# EAGLE board XBee-Explorer-Dongle-GiantPanel-v21 (EAGLE 6.5.0), part 1 of 4
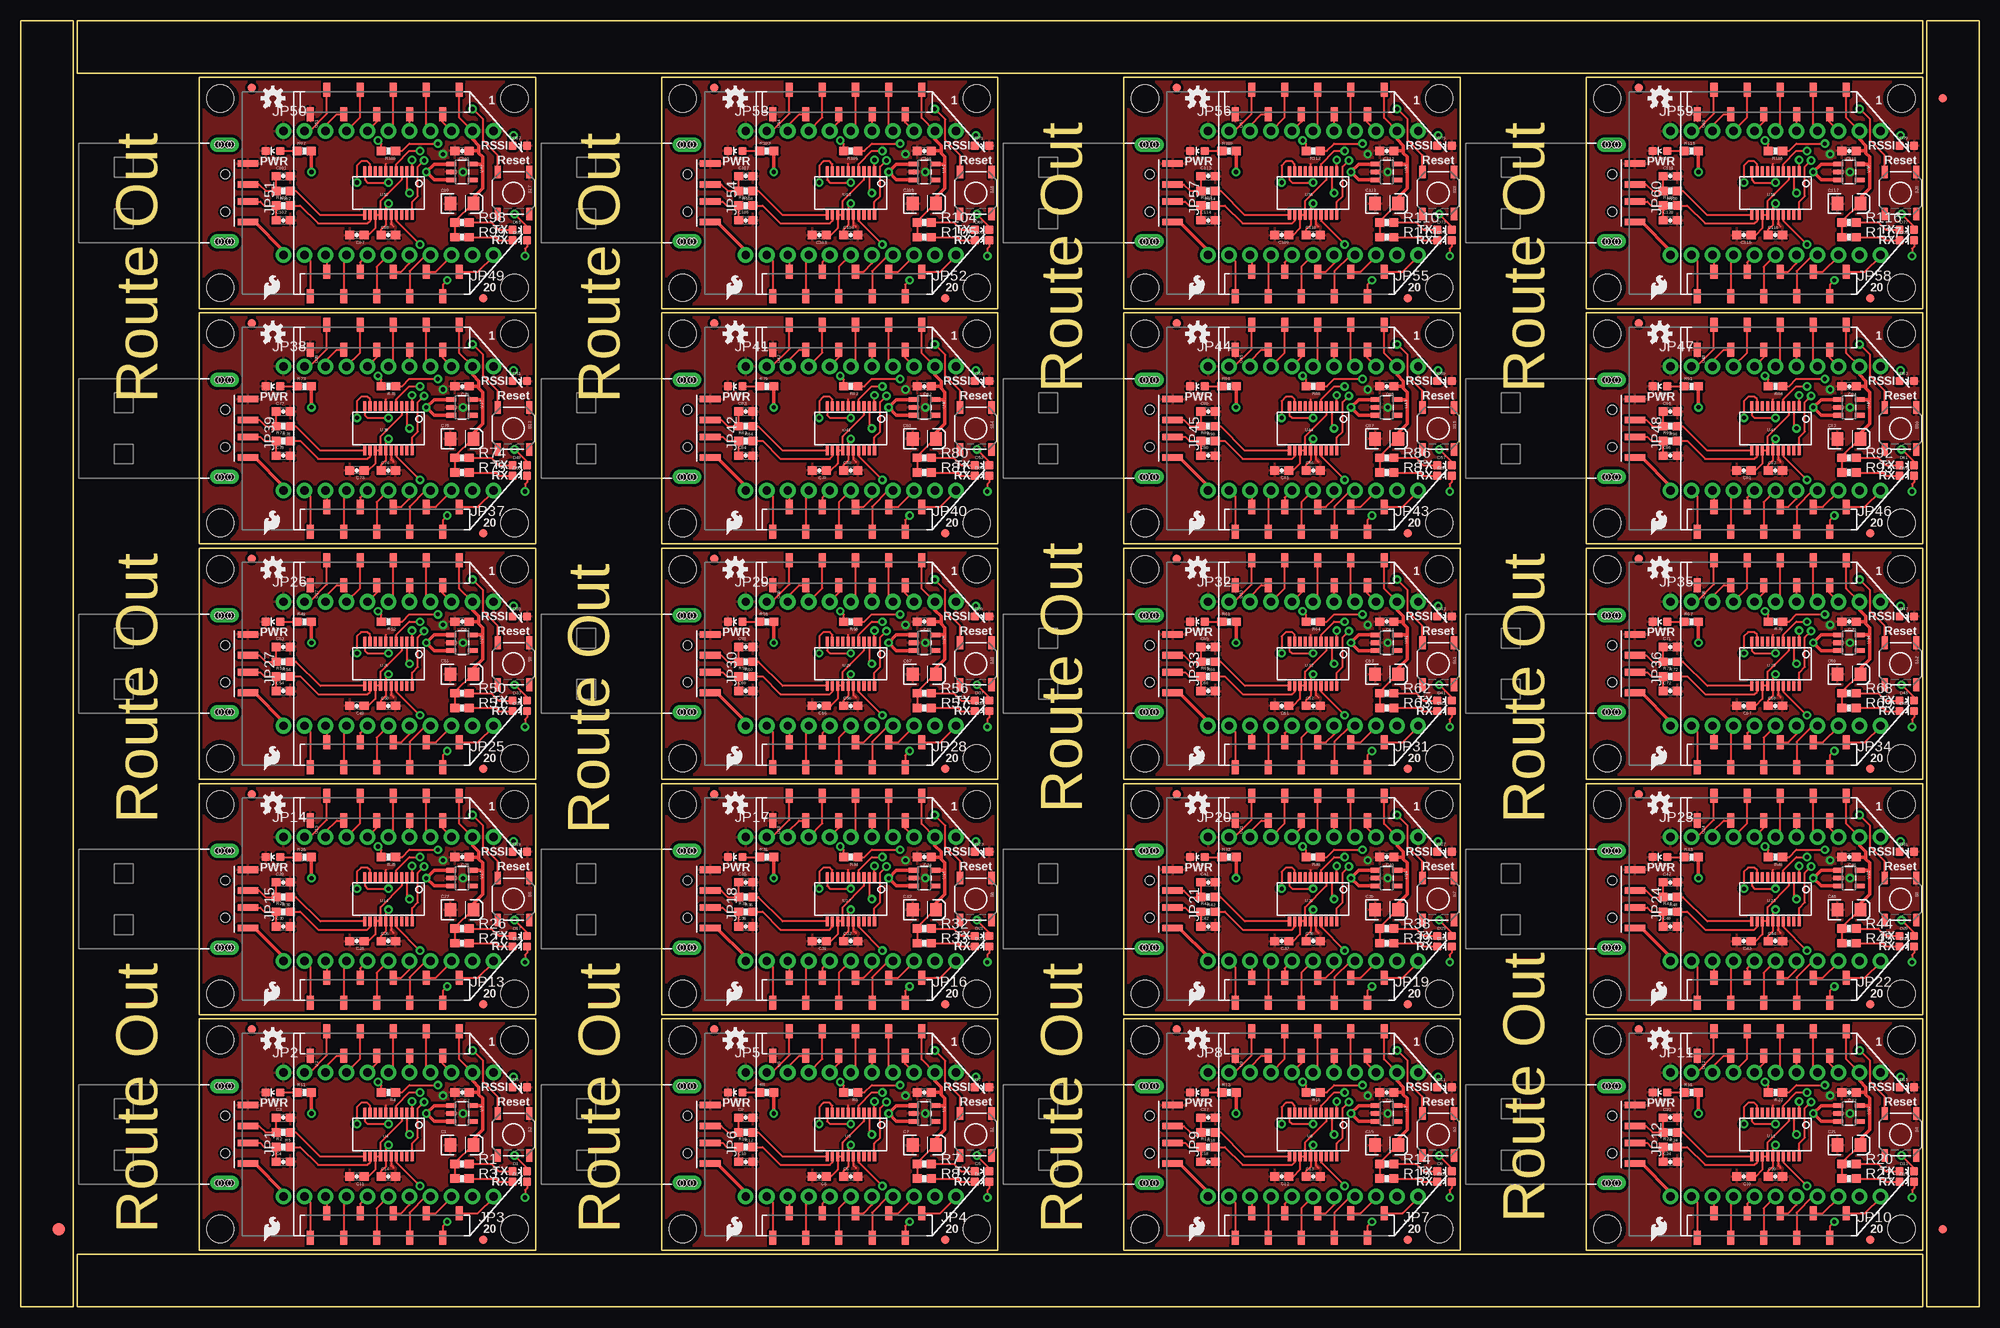
[diagram p0: board, top side]
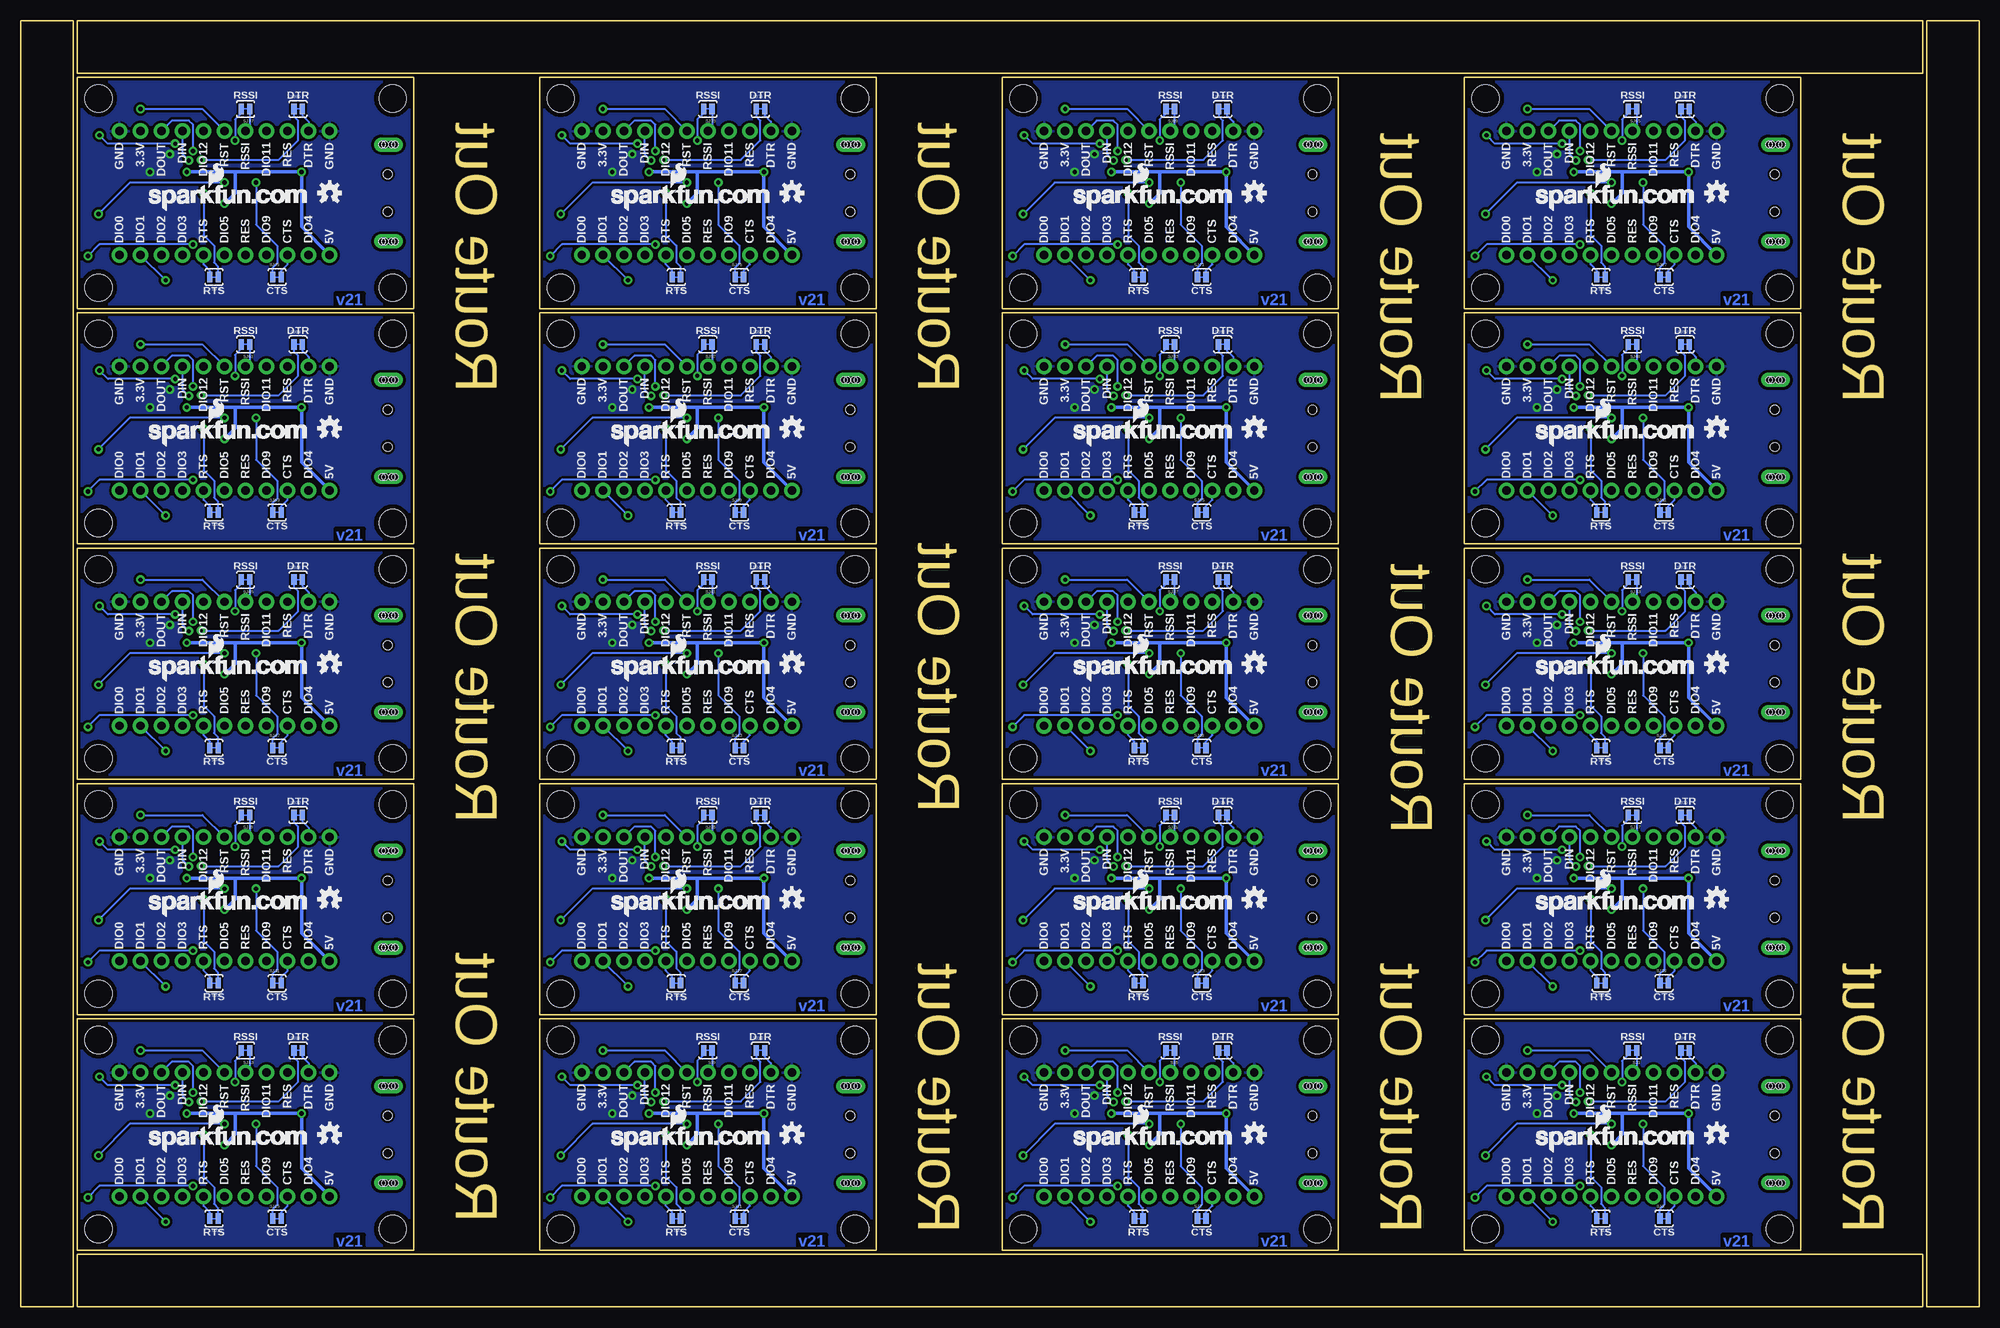
[diagram p1: board, bottom side, seen from below]

Size 236.73 x 155.45 mm. Coordinates in mm from the lower left corner, seen from the top.
Outline: 62.23,6.86 62.23,34.8 21.59,34.8 21.59,6.86 62.23,6.86
Outline: 118.11,6.86 118.11,34.8 77.47,34.8 77.47,6.86 118.11,6.86
Outline: 173.99,6.86 173.99,34.8 133.35,34.8 133.35,6.86 173.99,6.86
Outline: 229.87,6.86 229.87,34.8 189.23,34.8 189.23,6.86 229.87,6.86
Outline: 62.23,35.31 62.23,63.25 21.59,63.25 21.59,35.31 62.23,35.31
Outline: 118.11,35.31 118.11,63.25 77.47,63.25 77.47,35.31 118.11,35.31
Outline: 173.99,35.31 173.99,63.25 133.35,63.25 133.35,35.31 173.99,35.31
Outline: 229.87,35.31 229.87,63.25 189.23,63.25 189.23,35.31 229.87,35.31
Outline: 62.23,63.75 62.23,91.69 21.59,91.69 21.59,63.75 62.23,63.75
Outline: 118.11,63.75 118.11,91.69 77.47,91.69 77.47,63.75 118.11,63.75
Outline: 173.99,63.75 173.99,91.69 133.35,91.69 133.35,63.75 173.99,63.75
Outline: 229.87,63.75 229.87,91.69 189.23,91.69 189.23,63.75 229.87,63.75
Outline: 62.23,92.2 62.23,120.14 21.59,120.14 21.59,92.2 62.23,92.2
Outline: 118.11,92.2 118.11,120.14 77.47,120.14 77.47,92.2 118.11,92.2
Outline: 173.99,92.2 173.99,120.14 133.35,120.14 133.35,92.2 173.99,92.2
Outline: 229.87,92.2 229.87,120.14 189.23,120.14 189.23,92.2 229.87,92.2
Outline: 62.23,120.65 62.23,148.59 21.59,148.59 21.59,120.65 62.23,120.65
Outline: 118.11,120.65 118.11,148.59 77.47,148.59 77.47,120.65 118.11,120.65
Outline: 173.99,120.65 173.99,148.59 133.35,148.59 133.35,120.65 173.99,120.65
Outline: 229.87,120.65 229.87,148.59 189.23,148.59 189.23,120.65 229.87,120.65
Outline: 6.35,0 6.35,155.45 0,155.45 0,0 6.35,0
Outline: 6.86,6.35 6.86,0 229.87,0 229.87,6.35 6.86,6.35
Outline: 230.38,0 236.73,0 236.73,155.45 230.38,155.45 230.38,0
Outline: 229.87,149.1 229.87,155.45 6.86,155.45 6.86,149.1 229.87,149.1
Copper layers (1*16): Top 0.035mm / dielectric 1.5mm / Bottom 0.035mm
Design rules "SparkFun-2-layer": minimum track width 7mil, minimum drill 15mil, track to track 8mil, track to pad 8mil, pad to pad 8mil, via to via 8mil, smd to smd 8mil, copper to edge 8mil, drill to drill 8mil, minimum pad ring 12mil, minimum via ring 10mil, stop-mask expansion 4mil, vias tented up to drill 20mil, thermal gap 10mil
Net classes: 0 default: width 0.203 mm; 1 vcc: width 0.254 mm; 2 gnd: width 0.254 mm

## Footprints (pad centres in the part's own frame; a part is rotated, then mirrored left to right if it is on the bottom)
EIA3216 = smd 1.4 x 1.6: A 1.4,0; C -1.4,0
0603-CAP = smd 1.1 x 1: 1 -0.85,0; 2 0.85,0
LED-0603 = smd 1 x 1: A 0,-0.877; C 0,0.877
FIDUCIAL-1.5X3 = smd 1.5 x 1.5: 1 0,0
FIDUCIAL-1X2 = smd 1 x 1: 1 0,0
USB-A-SMT-MALE = smd 0.8 x 2.5: D+1 1.027,-5.87; D-1 -1.027,-5.87; GND1 3.551,-5.87; VBUS1 -3.5,-5.87 | drill 0.8 pad 1.778 long: P$1 5.85,-3.05; P$3 -5.85,-3.05 | hole 1.1: 2.25,-3.12; -2.25,-3.12 | hole 0.8: -5.85,-3.45; -5.85,-3.85; -5.85,-2.65; -5.85,-2.25; 5.85,-3.45; 5.85,-3.85; 5.85,-2.65; 5.85,-2.25
1X11_NO_SILK = drill 1.016 pad 1.88: 1 0,0; 2 2.54,0; 3 5.08,0; 4 7.62,0; 5 10.16,0; 6 12.7,0; 7 15.24,0; 8 17.78,0; 9 20.32,0; 10 22.86,0; 11 25.4,0
0603-RES = smd 1.1 x 1: 1 -0.85,0; 2 0.85,0
TACTILE_SWITCH_SMD = smd 1.524 x 0.762: 1 -2.54,1.905; 2 2.54,1.905; 3 -2.54,-1.905; 4 2.54,-1.905
SJ_2S-TRACE = smd 0.635 x 1.27: 1 -0.508,0; 2 0.508,0
SOT23-5 = smd 0.55 x 1.2: 1 -0.95,-1.3; 2 0,-1.3; 3 0.95,-1.3; 4 0.95,1.3; 5 -0.95,1.3
XBEE-SMD = smd 1.7 x 0.85: 1 -12.5,20; 2 -9.5,18; 3 -12.5,16; 4 -9.5,14; 5 -12.5,12; 6 -9.5,10; 7 -12.5,8; 8 -9.5,6; 9 -12.5,4; 10 -9.5,2; 11 12.5,2; 12 9.5,4; 13 12.5,6; 14 9.5,8; 15 12.5,10; 16 9.5,12; 17 12.5,14; 18 9.5,16; 19 12.5,18; 20 9.5,20
SSOP20_L = smd 0.381 x 1.143: 1 -2.857,-2.68; 2 -2.223,-2.68; 3 -1.587,-2.68; 4 -0.953,-2.68; 5 -0.318,-2.68; 6 0.318,-2.68; 7 0.953,-2.68; 8 1.587,-2.68; 9 2.223,-2.68; 10 2.857,-2.68; 11 2.857,2.68; 12 2.223,2.68; 13 1.587,2.68; 14 0.953,2.68; 15 0.318,2.68; 16 -0.318,2.68; 17 -0.953,2.68; 18 -1.587,2.68; 19 -2.223,2.68; 20 -2.857,2.68
STAND-OFF = hole 3.302: 0,0

## Placement (x,y rotation side)
C1  10uF  [EIA3216]  53.34,19.56 0 top
C2  0.1uF  [0603-CAP]  53.34,25.91 180 top
C3  47pF  [0603-CAP]  31.75,22.86 0 top
C4  47pF  [0603-CAP]  31.75,17.53 0 top
C5  0.1uF  [0603-CAP]  96.52,15.75 180 top
C6  0.1uF  [0603-CAP]  100.33,15.75 0 top
C7  10uF  [EIA3216]  109.22,19.56 0 top
C8  0.1uF  [0603-CAP]  109.22,25.91 180 top
C9  47pF  [0603-CAP]  87.63,22.86 0 top
C10  47pF  [0603-CAP]  87.63,17.53 0 top
C11  0.1uF  [0603-CAP]  40.64,15.75 180 top
C12  0.1uF  [0603-CAP]  152.4,15.75 180 top
C13  0.1uF  [0603-CAP]  156.21,15.75 0 top
C14  0.1uF  [0603-CAP]  44.45,15.75 0 top
C15  10uF  [EIA3216]  165.1,19.56 0 top
C16  0.1uF  [0603-CAP]  165.1,25.91 180 top
C17  47pF  [0603-CAP]  143.51,22.86 0 top
C18  47pF  [0603-CAP]  143.51,17.53 0 top
C19  0.1uF  [0603-CAP]  208.28,15.75 180 top
C20  0.1uF  [0603-CAP]  212.09,15.75 0 top
C21  10uF  [EIA3216]  220.98,19.56 0 top
C22  0.1uF  [0603-CAP]  220.98,25.91 180 top
C23  47pF  [0603-CAP]  199.39,22.86 0 top
C24  47pF  [0603-CAP]  199.39,17.53 0 top
C25  0.1uF  [0603-CAP]  40.64,44.2 180 top
C26  0.1uF  [0603-CAP]  44.45,44.2 0 top
C27  10uF  [EIA3216]  53.34,48.01 0 top
C28  0.1uF  [0603-CAP]  53.34,54.36 180 top
C29  47pF  [0603-CAP]  31.75,51.31 0 top
C30  47pF  [0603-CAP]  31.75,45.97 0 top
C31  0.1uF  [0603-CAP]  96.52,44.2 180 top
C32  0.1uF  [0603-CAP]  100.33,44.2 0 top
C33  10uF  [EIA3216]  109.22,48.01 0 top
C34  0.1uF  [0603-CAP]  109.22,54.36 180 top
C35  47pF  [0603-CAP]  87.63,51.31 0 top
C36  47pF  [0603-CAP]  87.63,45.97 0 top
C37  0.1uF  [0603-CAP]  152.4,44.2 180 top
C38  0.1uF  [0603-CAP]  156.21,44.2 0 top
C39  10uF  [EIA3216]  165.1,48.01 0 top
C40  0.1uF  [0603-CAP]  165.1,54.36 180 top
C41  47pF  [0603-CAP]  143.51,51.31 0 top
C42  47pF  [0603-CAP]  143.51,45.97 0 top
C43  0.1uF  [0603-CAP]  208.28,44.2 180 top
C44  0.1uF  [0603-CAP]  212.09,44.2 0 top
C45  10uF  [EIA3216]  220.98,48.01 0 top
C46  0.1uF  [0603-CAP]  220.98,54.36 180 top
C47  47pF  [0603-CAP]  199.39,51.31 0 top
C48  47pF  [0603-CAP]  199.39,45.97 0 top
C49  0.1uF  [0603-CAP]  40.64,72.64 180 top
C50  0.1uF  [0603-CAP]  44.45,72.64 0 top
C51  10uF  [EIA3216]  53.34,76.45 0 top
C52  0.1uF  [0603-CAP]  53.34,82.8 180 top
C53  47pF  [0603-CAP]  31.75,79.76 0 top
C54  47pF  [0603-CAP]  31.75,74.42 0 top
C55  0.1uF  [0603-CAP]  96.52,72.64 180 top
C56  0.1uF  [0603-CAP]  100.33,72.64 0 top
C57  10uF  [EIA3216]  109.22,76.45 0 top
C58  0.1uF  [0603-CAP]  109.22,82.8 180 top
C59  47pF  [0603-CAP]  87.63,79.76 0 top
C60  47pF  [0603-CAP]  87.63,74.42 0 top
C61  0.1uF  [0603-CAP]  152.4,72.64 180 top
C62  0.1uF  [0603-CAP]  156.21,72.64 0 top
C63  10uF  [EIA3216]  165.1,76.45 0 top
C64  0.1uF  [0603-CAP]  165.1,82.8 180 top
C65  47pF  [0603-CAP]  143.51,79.76 0 top
C66  47pF  [0603-CAP]  143.51,74.42 0 top
C67  0.1uF  [0603-CAP]  208.28,72.64 180 top
C68  0.1uF  [0603-CAP]  212.09,72.64 0 top
C69  10uF  [EIA3216]  220.98,76.45 0 top
C70  0.1uF  [0603-CAP]  220.98,82.8 180 top
C71  47pF  [0603-CAP]  199.39,79.76 0 top
C72  47pF  [0603-CAP]  199.39,74.42 0 top
C73  0.1uF  [0603-CAP]  40.64,101.09 180 top
C74  0.1uF  [0603-CAP]  44.45,101.09 0 top
C75  10uF  [EIA3216]  53.34,104.9 0 top
C76  0.1uF  [0603-CAP]  53.34,111.25 180 top
C77  47pF  [0603-CAP]  31.75,108.2 0 top
C78  47pF  [0603-CAP]  31.75,102.87 0 top
C79  0.1uF  [0603-CAP]  96.52,101.09 180 top
C80  0.1uF  [0603-CAP]  100.33,101.09 0 top
C81  10uF  [EIA3216]  109.22,104.9 0 top
C82  0.1uF  [0603-CAP]  109.22,111.25 180 top
C83  47pF  [0603-CAP]  87.63,108.2 0 top
C84  47pF  [0603-CAP]  87.63,102.87 0 top
C85  0.1uF  [0603-CAP]  152.4,101.09 180 top
C86  0.1uF  [0603-CAP]  156.21,101.09 0 top
C87  10uF  [EIA3216]  165.1,104.9 0 top
C88  0.1uF  [0603-CAP]  165.1,111.25 180 top
C89  47pF  [0603-CAP]  143.51,108.2 0 top
C90  47pF  [0603-CAP]  143.51,102.87 0 top
C91  0.1uF  [0603-CAP]  208.28,101.09 180 top
C92  0.1uF  [0603-CAP]  212.09,101.09 0 top
C93  10uF  [EIA3216]  220.98,104.9 0 top
C94  0.1uF  [0603-CAP]  220.98,111.25 180 top
C95  47pF  [0603-CAP]  199.39,108.2 0 top
C96  47pF  [0603-CAP]  199.39,102.87 0 top
C97  0.1uF  [0603-CAP]  40.64,129.54 180 top
C98  0.1uF  [0603-CAP]  44.45,129.54 0 top
C99  10uF  [EIA3216]  53.34,133.35 0 top
C100  0.1uF  [0603-CAP]  53.34,139.7 180 top
C101  47pF  [0603-CAP]  31.75,136.65 0 top
C102  47pF  [0603-CAP]  31.75,131.32 0 top
C103  0.1uF  [0603-CAP]  96.52,129.54 180 top
C104  0.1uF  [0603-CAP]  100.33,129.54 0 top
C105  10uF  [EIA3216]  109.22,133.35 0 top
C106  0.1uF  [0603-CAP]  109.22,139.7 180 top
C107  47pF  [0603-CAP]  87.63,136.65 0 top
C108  47pF  [0603-CAP]  87.63,131.32 0 top
C109  0.1uF  [0603-CAP]  152.4,129.54 180 top
C110  0.1uF  [0603-CAP]  156.21,129.54 0 top
C111  10uF  [EIA3216]  165.1,133.35 0 top
C112  0.1uF  [0603-CAP]  165.1,139.7 180 top
C113  47pF  [0603-CAP]  143.51,136.65 0 top
C114  47pF  [0603-CAP]  143.51,131.32 0 top
C115  0.1uF  [0603-CAP]  208.28,129.54 180 top
C116  0.1uF  [0603-CAP]  212.09,129.54 0 top
C117  10uF  [EIA3216]  220.98,133.35 0 top
C118  0.1uF  [0603-CAP]  220.98,139.7 180 top
C119  47pF  [0603-CAP]  199.39,136.65 0 top
C120  47pF  [0603-CAP]  199.39,131.32 0 top
D1  RED  [LED-0603]  60.33,16.38 270 top
D2  GREEN  [LED-0603]  60.33,15.11 270 top
D3  GREEN  [LED-0603]  60.33,26.54 270 top
D4  RED  [LED-0603]  30.48,25.91 90 top
D5  RED  [LED-0603]  116.2,16.38 270 top
D6  GREEN  [LED-0603]  116.2,15.11 270 top
D7  GREEN  [LED-0603]  116.2,26.54 270 top
D8  RED  [LED-0603]  86.36,25.91 90 top
D9  RED  [LED-0603]  172.09,16.38 270 top
D10  GREEN  [LED-0603]  172.09,15.11 270 top
D11  GREEN  [LED-0603]  172.09,26.54 270 top
D12  RED  [LED-0603]  142.24,25.91 90 top
D13  RED  [LED-0603]  227.97,16.38 270 top
D14  GREEN  [LED-0603]  227.97,15.11 270 top
D15  GREEN  [LED-0603]  227.97,26.54 270 top
D16  RED  [LED-0603]  198.12,25.91 90 top
D17  RED  [LED-0603]  60.33,44.83 270 top
D18  GREEN  [LED-0603]  60.33,43.56 270 top
D19  GREEN  [LED-0603]  60.33,54.99 270 top
D20  RED  [LED-0603]  30.48,54.36 90 top
D21  RED  [LED-0603]  116.2,44.83 270 top
D22  GREEN  [LED-0603]  116.2,43.56 270 top
D23  GREEN  [LED-0603]  116.2,54.99 270 top
D24  RED  [LED-0603]  86.36,54.36 90 top
D25  RED  [LED-0603]  172.09,44.83 270 top
D26  GREEN  [LED-0603]  172.09,43.56 270 top
D27  GREEN  [LED-0603]  172.09,54.99 270 top
D28  RED  [LED-0603]  142.24,54.36 90 top
D29  RED  [LED-0603]  227.97,44.83 270 top
D30  GREEN  [LED-0603]  227.97,43.56 270 top
D31  GREEN  [LED-0603]  227.97,54.99 270 top
D32  RED  [LED-0603]  198.12,54.36 90 top
D33  RED  [LED-0603]  60.33,73.28 270 top
D34  GREEN  [LED-0603]  60.33,72.01 270 top
D35  GREEN  [LED-0603]  60.33,83.44 270 top
D36  RED  [LED-0603]  30.48,82.8 90 top
D37  RED  [LED-0603]  116.2,73.28 270 top
D38  GREEN  [LED-0603]  116.2,72.01 270 top
D39  GREEN  [LED-0603]  116.2,83.44 270 top
D40  RED  [LED-0603]  86.36,82.8 90 top
D41  RED  [LED-0603]  172.09,73.28 270 top
D42  GREEN  [LED-0603]  172.09,72.01 270 top
D43  GREEN  [LED-0603]  172.09,83.44 270 top
D44  RED  [LED-0603]  142.24,82.8 90 top
D45  RED  [LED-0603]  227.97,73.28 270 top
D46  GREEN  [LED-0603]  227.97,72.01 270 top
D47  GREEN  [LED-0603]  227.97,83.44 270 top
D48  RED  [LED-0603]  198.12,82.8 90 top
D49  RED  [LED-0603]  60.33,101.73 270 top
D50  GREEN  [LED-0603]  60.33,100.46 270 top
D51  GREEN  [LED-0603]  60.33,111.89 270 top
D52  RED  [LED-0603]  30.48,111.25 90 top
D53  RED  [LED-0603]  116.2,101.73 270 top
D54  GREEN  [LED-0603]  116.2,100.46 270 top
D55  GREEN  [LED-0603]  116.2,111.89 270 top
D56  RED  [LED-0603]  86.36,111.25 90 top
D57  RED  [LED-0603]  172.09,101.73 270 top
D58  GREEN  [LED-0603]  172.09,100.46 270 top
D59  GREEN  [LED-0603]  172.09,111.89 270 top
D60  RED  [LED-0603]  142.24,111.25 90 top
D61  RED  [LED-0603]  227.97,101.73 270 top
D62  GREEN  [LED-0603]  227.97,100.46 270 top
D63  GREEN  [LED-0603]  227.97,111.89 270 top
D64  RED  [LED-0603]  198.12,111.25 90 top
D65  RED  [LED-0603]  60.33,130.18 270 top
D66  GREEN  [LED-0603]  60.33,128.91 270 top
D67  GREEN  [LED-0603]  60.33,140.34 270 top
D68  RED  [LED-0603]  30.48,139.7 90 top
D69  RED  [LED-0603]  116.2,130.18 270 top
D70  GREEN  [LED-0603]  116.2,128.91 270 top
D71  GREEN  [LED-0603]  116.2,140.34 270 top
D72  RED  [LED-0603]  86.36,139.7 90 top
D73  RED  [LED-0603]  172.09,130.18 270 top
D74  GREEN  [LED-0603]  172.09,128.91 270 top
D75  GREEN  [LED-0603]  172.09,140.34 270 top
D76  RED  [LED-0603]  142.24,139.7 90 top
D77  RED  [LED-0603]  227.97,130.18 270 top
D78  GREEN  [LED-0603]  227.97,128.91 270 top
D79  GREEN  [LED-0603]  227.97,140.34 270 top
D80  RED  [LED-0603]  198.12,139.7 90 top
E$1  [FIDUCIAL-1.5X3]  4.57,9.4 0 top
E$5  [FIDUCIAL-1X2]  232.28,9.4 0 top
E$7  [FIDUCIAL-1X2]  232.28,146.05 180 top
FID1  FIDUCIAL1X2  [FIDUCIAL-1X2]  27.94,33.53 0 top
FID2  FIDUCIAL1X2  [FIDUCIAL-1X2]  55.88,8.13 0 top
FID3  FIDUCIAL1X2  [FIDUCIAL-1X2]  83.82,33.53 0 top
FID4  FIDUCIAL1X2  [FIDUCIAL-1X2]  111.76,8.13 0 top
FID5  FIDUCIAL1X2  [FIDUCIAL-1X2]  139.7,33.53 0 top
FID6  FIDUCIAL1X2  [FIDUCIAL-1X2]  167.64,8.13 0 top
FID7  FIDUCIAL1X2  [FIDUCIAL-1X2]  195.58,33.53 0 top
FID8  FIDUCIAL1X2  [FIDUCIAL-1X2]  223.52,8.13 0 top
FID9  FIDUCIAL1X2  [FIDUCIAL-1X2]  27.94,61.98 0 top
FID10  FIDUCIAL1X2  [FIDUCIAL-1X2]  55.88,36.58 0 top
FID11  FIDUCIAL1X2  [FIDUCIAL-1X2]  83.82,61.98 0 top
FID12  FIDUCIAL1X2  [FIDUCIAL-1X2]  111.76,36.58 0 top
FID13  FIDUCIAL1X2  [FIDUCIAL-1X2]  139.7,61.98 0 top
FID14  FIDUCIAL1X2  [FIDUCIAL-1X2]  167.64,36.58 0 top
FID15  FIDUCIAL1X2  [FIDUCIAL-1X2]  195.58,61.98 0 top
FID16  FIDUCIAL1X2  [FIDUCIAL-1X2]  223.52,36.58 0 top
FID17  FIDUCIAL1X2  [FIDUCIAL-1X2]  27.94,90.42 0 top
FID18  FIDUCIAL1X2  [FIDUCIAL-1X2]  55.88,65.02 0 top
FID19  FIDUCIAL1X2  [FIDUCIAL-1X2]  83.82,90.42 0 top
FID20  FIDUCIAL1X2  [FIDUCIAL-1X2]  111.76,65.02 0 top
FID21  FIDUCIAL1X2  [FIDUCIAL-1X2]  139.7,90.42 0 top
FID22  FIDUCIAL1X2  [FIDUCIAL-1X2]  167.64,65.02 0 top
FID23  FIDUCIAL1X2  [FIDUCIAL-1X2]  195.58,90.42 0 top
FID24  FIDUCIAL1X2  [FIDUCIAL-1X2]  223.52,65.02 0 top
FID25  FIDUCIAL1X2  [FIDUCIAL-1X2]  27.94,118.87 0 top
FID26  FIDUCIAL1X2  [FIDUCIAL-1X2]  55.88,93.47 0 top
FID27  FIDUCIAL1X2  [FIDUCIAL-1X2]  83.82,118.87 0 top
FID28  FIDUCIAL1X2  [FIDUCIAL-1X2]  111.76,93.47 0 top
FID29  FIDUCIAL1X2  [FIDUCIAL-1X2]  139.7,118.87 0 top
FID30  FIDUCIAL1X2  [FIDUCIAL-1X2]  167.64,93.47 0 top
FID31  FIDUCIAL1X2  [FIDUCIAL-1X2]  195.58,118.87 0 top
FID32  FIDUCIAL1X2  [FIDUCIAL-1X2]  223.52,93.47 0 top
FID33  FIDUCIAL1X2  [FIDUCIAL-1X2]  27.94,147.32 0 top
FID34  FIDUCIAL1X2  [FIDUCIAL-1X2]  55.88,121.92 0 top
FID35  FIDUCIAL1X2  [FIDUCIAL-1X2]  83.82,147.32 0 top
FID36  FIDUCIAL1X2  [FIDUCIAL-1X2]  111.76,121.92 0 top
FID37  FIDUCIAL1X2  [FIDUCIAL-1X2]  139.7,147.32 0 top
FID38  FIDUCIAL1X2  [FIDUCIAL-1X2]  167.64,121.92 0 top
FID39  FIDUCIAL1X2  [FIDUCIAL-1X2]  195.58,147.32 0 top
FID40  FIDUCIAL1X2  [FIDUCIAL-1X2]  223.52,121.92 0 top
JP1  USBA-SMD-MALE  [USB-A-SMT-MALE]  21.59,20.83 90 top
JP2  M111X11_NO_SILK  [1X11_NO_SILK]  31.75,28.32 0 top
JP3  M111X11_NO_SILK  [1X11_NO_SILK]  57.15,13.34 180 top
JP4  M111X11_NO_SILK  [1X11_NO_SILK]  113.03,13.34 180 top
JP5  M111X11_NO_SILK  [1X11_NO_SILK]  87.63,28.32 0 top
JP6  USBA-SMD-MALE  [USB-A-SMT-MALE]  77.47,20.83 90 top
JP7  M111X11_NO_SILK  [1X11_NO_SILK]  168.91,13.34 180 top
JP8  M111X11_NO_SILK  [1X11_NO_SILK]  143.51,28.32 0 top
JP9  USBA-SMD-MALE  [USB-A-SMT-MALE]  133.35,20.83 90 top
JP10  M111X11_NO_SILK  [1X11_NO_SILK]  224.79,13.34 180 top
JP11  M111X11_NO_SILK  [1X11_NO_SILK]  199.39,28.32 0 top
JP12  USBA-SMD-MALE  [USB-A-SMT-MALE]  189.23,20.83 90 top
JP13  M111X11_NO_SILK  [1X11_NO_SILK]  57.15,41.78 180 top
JP14  M111X11_NO_SILK  [1X11_NO_SILK]  31.75,56.77 0 top
JP15  USBA-SMD-MALE  [USB-A-SMT-MALE]  21.59,49.28 90 top
JP16  M111X11_NO_SILK  [1X11_NO_SILK]  113.03,41.78 180 top
JP17  M111X11_NO_SILK  [1X11_NO_SILK]  87.63,56.77 0 top
JP18  USBA-SMD-MALE  [USB-A-SMT-MALE]  77.47,49.28 90 top
JP19  M111X11_NO_SILK  [1X11_NO_SILK]  168.91,41.78 180 top
JP20  M111X11_NO_SILK  [1X11_NO_SILK]  143.51,56.77 0 top
JP21  USBA-SMD-MALE  [USB-A-SMT-MALE]  133.35,49.28 90 top
JP22  M111X11_NO_SILK  [1X11_NO_SILK]  224.79,41.78 180 top
JP23  M111X11_NO_SILK  [1X11_NO_SILK]  199.39,56.77 0 top
JP24  USBA-SMD-MALE  [USB-A-SMT-MALE]  189.23,49.28 90 top
JP25  M111X11_NO_SILK  [1X11_NO_SILK]  57.15,70.23 180 top
JP26  M111X11_NO_SILK  [1X11_NO_SILK]  31.75,85.22 0 top
JP27  USBA-SMD-MALE  [USB-A-SMT-MALE]  21.59,77.72 90 top
JP28  M111X11_NO_SILK  [1X11_NO_SILK]  113.03,70.23 180 top
JP29  M111X11_NO_SILK  [1X11_NO_SILK]  87.63,85.22 0 top
JP30  USBA-SMD-MALE  [USB-A-SMT-MALE]  77.47,77.72 90 top
JP31  M111X11_NO_SILK  [1X11_NO_SILK]  168.91,70.23 180 top
JP32  M111X11_NO_SILK  [1X11_NO_SILK]  143.51,85.22 0 top
JP33  USBA-SMD-MALE  [USB-A-SMT-MALE]  133.35,77.72 90 top
JP34  M111X11_NO_SILK  [1X11_NO_SILK]  224.79,70.23 180 top
JP35  M111X11_NO_SILK  [1X11_NO_SILK]  199.39,85.22 0 top
JP36  USBA-SMD-MALE  [USB-A-SMT-MALE]  189.23,77.72 90 top
JP37  M111X11_NO_SILK  [1X11_NO_SILK]  57.15,98.68 180 top
JP38  M111X11_NO_SILK  [1X11_NO_SILK]  31.75,113.67 0 top
JP39  USBA-SMD-MALE  [USB-A-SMT-MALE]  21.59,106.17 90 top
JP40  M111X11_NO_SILK  [1X11_NO_SILK]  113.03,98.68 180 top
JP41  M111X11_NO_SILK  [1X11_NO_SILK]  87.63,113.67 0 top
JP42  USBA-SMD-MALE  [USB-A-SMT-MALE]  77.47,106.17 90 top
JP43  M111X11_NO_SILK  [1X11_NO_SILK]  168.91,98.68 180 top
JP44  M111X11_NO_SILK  [1X11_NO_SILK]  143.51,113.67 0 top
JP45  USBA-SMD-MALE  [USB-A-SMT-MALE]  133.35,106.17 90 top
JP46  M111X11_NO_SILK  [1X11_NO_SILK]  224.79,98.68 180 top
JP47  M111X11_NO_SILK  [1X11_NO_SILK]  199.39,113.67 0 top
JP48  USBA-SMD-MALE  [USB-A-SMT-MALE]  189.23,106.17 90 top
JP49  M111X11_NO_SILK  [1X11_NO_SILK]  57.15,127.13 180 top
JP50  M111X11_NO_SILK  [1X11_NO_SILK]  31.75,142.11 0 top
JP51  USBA-SMD-MALE  [USB-A-SMT-MALE]  21.59,134.62 90 top
JP52  M111X11_NO_SILK  [1X11_NO_SILK]  113.03,127.13 180 top
JP53  M111X11_NO_SILK  [1X11_NO_SILK]  87.63,142.11 0 top
JP54  USBA-SMD-MALE  [USB-A-SMT-MALE]  77.47,134.62 90 top
JP55  M111X11_NO_SILK  [1X11_NO_SILK]  168.91,127.13 180 top
JP56  M111X11_NO_SILK  [1X11_NO_SILK]  143.51,142.11 0 top
JP57  USBA-SMD-MALE  [USB-A-SMT-MALE]  133.35,134.62 90 top
JP58  M111X11_NO_SILK  [1X11_NO_SILK]  224.79,127.13 180 top
JP59  M111X11_NO_SILK  [1X11_NO_SILK]  199.39,142.11 0 top
JP60  USBA-SMD-MALE  [USB-A-SMT-MALE]  189.23,134.62 90 top
R1  1K  [0603-RES]  53.34,17.27 0 top
R2  27  [0603-RES]  31.75,19.3 0 top
R3  1K  [0603-RES]  53.34,15.49 0 top
R4  330  [0603-RES]  44.45,25.91 180 top
R5  27  [0603-RES]  31.75,21.08 180 top
R6  1K  [0603-RES]  90.17,25.91 0 top
R7  1K  [0603-RES]  109.22,17.27 0 top
R8  1K  [0603-RES]  109.22,15.49 0 top
R9  330  [0603-RES]  100.33,25.91 180 top
R10  27  [0603-RES]  87.63,19.3 0 top
R11  1K  [0603-RES]  34.29,25.91 0 top
R12  27  [0603-RES]  87.63,21.08 180 top
R13  1K  [0603-RES]  146.05,25.91 0 top
R14  1K  [0603-RES]  165.1,17.27 0 top
R15  1K  [0603-RES]  165.1,15.49 0 top
R16  330  [0603-RES]  156.21,25.91 180 top
R17  27  [0603-RES]  143.51,19.3 0 top
R18  27  [0603-RES]  143.51,21.08 180 top
R19  1K  [0603-RES]  201.93,25.91 0 top
R20  1K  [0603-RES]  220.98,17.27 0 top
R21  1K  [0603-RES]  220.98,15.49 0 top
R22  330  [0603-RES]  212.09,25.91 180 top
R23  27  [0603-RES]  199.39,19.3 0 top
R24  27  [0603-RES]  199.39,21.08 180 top
R25  1K  [0603-RES]  34.29,54.36 0 top
R26  1K  [0603-RES]  53.34,45.72 0 top
R27  1K  [0603-RES]  53.34,43.94 0 top
R28  330  [0603-RES]  44.45,54.36 180 top
R29  27  [0603-RES]  31.75,47.75 0 top
R30  27  [0603-RES]  31.75,49.53 180 top
R31  1K  [0603-RES]  90.17,54.36 0 top
R32  1K  [0603-RES]  109.22,45.72 0 top
R33  1K  [0603-RES]  109.22,43.94 0 top
R34  330  [0603-RES]  100.33,54.36 180 top
R35  27  [0603-RES]  87.63,47.75 0 top
R36  27  [0603-RES]  87.63,49.53 180 top
R37  1K  [0603-RES]  146.05,54.36 0 top
R38  1K  [0603-RES]  165.1,45.72 0 top
R39  1K  [0603-RES]  165.1,43.94 0 top
R40  330  [0603-RES]  156.21,54.36 180 top
R41  27  [0603-RES]  143.51,47.75 0 top
R42  27  [0603-RES]  143.51,49.53 180 top
R43  1K  [0603-RES]  201.93,54.36 0 top
R44  1K  [0603-RES]  220.98,45.72 0 top
R45  1K  [0603-RES]  220.98,43.94 0 top
R46  330  [0603-RES]  212.09,54.36 180 top
R47  27  [0603-RES]  199.39,47.75 0 top
R48  27  [0603-RES]  199.39,49.53 180 top
R49  1K  [0603-RES]  34.29,82.8 0 top
R50  1K  [0603-RES]  53.34,74.17 0 top
R51  1K  [0603-RES]  53.34,72.39 0 top
R52  330  [0603-RES]  44.45,82.8 180 top
R53  27  [0603-RES]  31.75,76.2 0 top
R54  27  [0603-RES]  31.75,77.98 180 top
R55  1K  [0603-RES]  90.17,82.8 0 top
R56  1K  [0603-RES]  109.22,74.17 0 top
R57  1K  [0603-RES]  109.22,72.39 0 top
R58  330  [0603-RES]  100.33,82.8 180 top
R59  27  [0603-RES]  87.63,76.2 0 top
R60  27  [0603-RES]  87.63,77.98 180 top
R61  1K  [0603-RES]  146.05,82.8 0 top
R62  1K  [0603-RES]  165.1,74.17 0 top
R63  1K  [0603-RES]  165.1,72.39 0 top
R64  330  [0603-RES]  156.21,82.8 180 top
R65  27  [0603-RES]  143.51,76.2 0 top
R66  27  [0603-RES]  143.51,77.98 180 top
R67  1K  [0603-RES]  201.93,82.8 0 top
R68  1K  [0603-RES]  220.98,74.17 0 top
R69  1K  [0603-RES]  220.98,72.39 0 top
R70  330  [0603-RES]  212.09,82.8 180 top
R71  27  [0603-RES]  199.39,76.2 0 top
R72  27  [0603-RES]  199.39,77.98 180 top
R73  1K  [0603-RES]  34.29,111.25 0 top
R74  1K  [0603-RES]  53.34,102.62 0 top
R75  1K  [0603-RES]  53.34,100.84 0 top
R76  330  [0603-RES]  44.45,111.25 180 top
R77  27  [0603-RES]  31.75,104.65 0 top
R78  27  [0603-RES]  31.75,106.43 180 top
R79  1K  [0603-RES]  90.17,111.25 0 top
R80  1K  [0603-RES]  109.22,102.62 0 top
R81  1K  [0603-RES]  109.22,100.84 0 top
R82  330  [0603-RES]  100.33,111.25 180 top
R83  27  [0603-RES]  87.63,104.65 0 top
R84  27  [0603-RES]  87.63,106.43 180 top
R85  1K  [0603-RES]  146.05,111.25 0 top
R86  1K  [0603-RES]  165.1,102.62 0 top
R87  1K  [0603-RES]  165.1,100.84 0 top
R88  330  [0603-RES]  156.21,111.25 180 top
R89  27  [0603-RES]  143.51,104.65 0 top
R90  27  [0603-RES]  143.51,106.43 180 top
R91  1K  [0603-RES]  201.93,111.25 0 top
R92  1K  [0603-RES]  220.98,102.62 0 top
R93  1K  [0603-RES]  220.98,100.84 0 top
R94  330  [0603-RES]  212.09,111.25 180 top
R95  27  [0603-RES]  199.39,104.65 0 top
R96  27  [0603-RES]  199.39,106.43 180 top
R97  1K  [0603-RES]  34.29,139.7 0 top
R98  1K  [0603-RES]  53.34,131.06 0 top
R99  1K  [0603-RES]  53.34,129.29 0 top
R100  330  [0603-RES]  44.45,139.7 180 top
R101  27  [0603-RES]  31.75,133.1 0 top
R102  27  [0603-RES]  31.75,134.87 180 top
R103  1K  [0603-RES]  90.17,139.7 0 top
R104  1K  [0603-RES]  109.22,131.06 0 top
R105  1K  [0603-RES]  109.22,129.29 0 top
R106  330  [0603-RES]  100.33,139.7 180 top
R107  27  [0603-RES]  87.63,133.1 0 top
R108  27  [0603-RES]  87.63,134.87 180 top
R109  1K  [0603-RES]  146.05,139.7 0 top
R110  1K  [0603-RES]  165.1,131.06 0 top
R111  1K  [0603-RES]  165.1,129.29 0 top
R112  330  [0603-RES]  156.21,139.7 180 top
R113  27  [0603-RES]  143.51,133.1 0 top
R114  27  [0603-RES]  143.51,134.87 180 top
R115  1K  [0603-RES]  201.93,139.7 0 top
R116  1K  [0603-RES]  220.98,131.06 0 top
R117  1K  [0603-RES]  220.98,129.29 0 top
R118  330  [0603-RES]  212.09,139.7 180 top
R119  27  [0603-RES]  199.39,133.1 0 top
R120  27  [0603-RES]  199.39,134.87 180 top
S1  Reset  [TACTILE_SWITCH_SMD]  115.44,20.83 270 top
S2  Reset  [TACTILE_SWITCH_SMD]  59.56,20.83 270 top
S3  Reset  [TACTILE_SWITCH_SMD]  171.32,20.83 270 top
S4  Reset  [TACTILE_SWITCH_SMD]  227.2,20.83 270 top
S5  Reset  [TACTILE_SWITCH_SMD]  59.56,49.28 270 top
S6  Reset  [TACTILE_SWITCH_SMD]  115.44,49.28 270 top
S7  Reset  [TACTILE_SWITCH_SMD]  171.32,49.28 270 top
S8  Reset  [TACTILE_SWITCH_SMD]  227.2,49.28 270 top
S9  Reset  [TACTILE_SWITCH_SMD]  59.56,77.72 270 top
S10  Reset  [TACTILE_SWITCH_SMD]  115.44,77.72 270 top
S11  Reset  [TACTILE_SWITCH_SMD]  171.32,77.72 270 top
S12  Reset  [TACTILE_SWITCH_SMD]  227.2,77.72 270 top
S13  Reset  [TACTILE_SWITCH_SMD]  59.56,106.17 270 top
S14  Reset  [TACTILE_SWITCH_SMD]  115.44,106.17 270 top
S15  Reset  [TACTILE_SWITCH_SMD]  171.32,106.17 270 top
S16  Reset  [TACTILE_SWITCH_SMD]  227.2,106.17 270 top
S17  Reset  [TACTILE_SWITCH_SMD]  59.56,134.62 270 top
S18  Reset  [TACTILE_SWITCH_SMD]  115.44,134.62 270 top
S19  Reset  [TACTILE_SWITCH_SMD]  171.32,134.62 270 top
S20  Reset  [TACTILE_SWITCH_SMD]  227.2,134.62 270 top
SJ1  RSSI  [SJ_2S-TRACE]  41.91,30.99 180 bottom
SJ2  RSSI  [SJ_2S-TRACE]  45.72,10.67 180 bottom
SJ3  RSSI  [SJ_2S-TRACE]  38.1,10.67 0 bottom
SJ4  RSSI  [SJ_2S-TRACE]  35.56,30.99 0 bottom
SJ5  RSSI  [SJ_2S-TRACE]  97.79,30.99 180 bottom
SJ6  RSSI  [SJ_2S-TRACE]  101.6,10.67 180 bottom
SJ7  RSSI  [SJ_2S-TRACE]  93.98,10.67 0 bottom
SJ8  RSSI  [SJ_2S-TRACE]  91.44,30.99 0 bottom
SJ9  RSSI  [SJ_2S-TRACE]  153.67,30.99 180 bottom
SJ10  RSSI  [SJ_2S-TRACE]  157.48,10.67 180 bottom
SJ11  RSSI  [SJ_2S-TRACE]  149.86,10.67 0 bottom
SJ12  RSSI  [SJ_2S-TRACE]  147.32,30.99 0 bottom
SJ13  RSSI  [SJ_2S-TRACE]  209.55,30.99 180 bottom
SJ14  RSSI  [SJ_2S-TRACE]  213.36,10.67 180 bottom
SJ15  RSSI  [SJ_2S-TRACE]  205.74,10.67 0 bottom
SJ16  RSSI  [SJ_2S-TRACE]  203.2,30.99 0 bottom
SJ17  RSSI  [SJ_2S-TRACE]  41.91,59.44 180 bottom
SJ18  RSSI  [SJ_2S-TRACE]  45.72,39.12 180 bottom
SJ19  RSSI  [SJ_2S-TRACE]  38.1,39.12 0 bottom
SJ20  RSSI  [SJ_2S-TRACE]  35.56,59.44 0 bottom
SJ21  RSSI  [SJ_2S-TRACE]  97.79,59.44 180 bottom
SJ22  RSSI  [SJ_2S-TRACE]  101.6,39.12 180 bottom
SJ23  RSSI  [SJ_2S-TRACE]  93.98,39.12 0 bottom
SJ24  RSSI  [SJ_2S-TRACE]  91.44,59.44 0 bottom
SJ25  RSSI  [SJ_2S-TRACE]  153.67,59.44 180 bottom
SJ26  RSSI  [SJ_2S-TRACE]  157.48,39.12 180 bottom
SJ27  RSSI  [SJ_2S-TRACE]  149.86,39.12 0 bottom
SJ28  RSSI  [SJ_2S-TRACE]  147.32,59.44 0 bottom
SJ29  RSSI  [SJ_2S-TRACE]  209.55,59.44 180 bottom
SJ30  RSSI  [SJ_2S-TRACE]  213.36,39.12 180 bottom
SJ31  RSSI  [SJ_2S-TRACE]  205.74,39.12 0 bottom
SJ32  RSSI  [SJ_2S-TRACE]  203.2,59.44 0 bottom
SJ33  RSSI  [SJ_2S-TRACE]  41.91,87.88 180 bottom
SJ34  RSSI  [SJ_2S-TRACE]  45.72,67.56 180 bottom
SJ35  RSSI  [SJ_2S-TRACE]  38.1,67.56 0 bottom
SJ36  RSSI  [SJ_2S-TRACE]  35.56,87.88 0 bottom
SJ37  RSSI  [SJ_2S-TRACE]  97.79,87.88 180 bottom
SJ38  RSSI  [SJ_2S-TRACE]  101.6,67.56 180 bottom
SJ39  RSSI  [SJ_2S-TRACE]  93.98,67.56 0 bottom
SJ40  RSSI  [SJ_2S-TRACE]  91.44,87.88 0 bottom
SJ41  RSSI  [SJ_2S-TRACE]  153.67,87.88 180 bottom
SJ42  RSSI  [SJ_2S-TRACE]  157.48,67.56 180 bottom
SJ43  RSSI  [SJ_2S-TRACE]  149.86,67.56 0 bottom
SJ44  RSSI  [SJ_2S-TRACE]  147.32,87.88 0 bottom
SJ45  RSSI  [SJ_2S-TRACE]  209.55,87.88 180 bottom
SJ46  RSSI  [SJ_2S-TRACE]  213.36,67.56 180 bottom
SJ47  RSSI  [SJ_2S-TRACE]  205.74,67.56 0 bottom
SJ48  RSSI  [SJ_2S-TRACE]  203.2,87.88 0 bottom
SJ49  RSSI  [SJ_2S-TRACE]  41.91,116.33 180 bottom
SJ50  RSSI  [SJ_2S-TRACE]  45.72,96.01 180 bottom
SJ51  RSSI  [SJ_2S-TRACE]  38.1,96.01 0 bottom
SJ52  RSSI  [SJ_2S-TRACE]  35.56,116.33 0 bottom
SJ53  RSSI  [SJ_2S-TRACE]  97.79,116.33 180 bottom
SJ54  RSSI  [SJ_2S-TRACE]  101.6,96.01 180 bottom
SJ55  RSSI  [SJ_2S-TRACE]  93.98,96.01 0 bottom
SJ56  RSSI  [SJ_2S-TRACE]  91.44,116.33 0 bottom
SJ57  RSSI  [SJ_2S-TRACE]  153.67,116.33 180 bottom
SJ58  RSSI  [SJ_2S-TRACE]  157.48,96.01 180 bottom
SJ59  RSSI  [SJ_2S-TRACE]  149.86,96.01 0 bottom
SJ60  RSSI  [SJ_2S-TRACE]  147.32,116.33 0 bottom
SJ61  RSSI  [SJ_2S-TRACE]  209.55,116.33 180 bottom
SJ62  RSSI  [SJ_2S-TRACE]  213.36,96.01 180 bottom
SJ63  RSSI  [SJ_2S-TRACE]  205.74,96.01 0 bottom
SJ64  RSSI  [SJ_2S-TRACE]  203.2,116.33 0 bottom
SJ65  RSSI  [SJ_2S-TRACE]  41.91,144.78 180 bottom
SJ66  RSSI  [SJ_2S-TRACE]  45.72,124.46 180 bottom
SJ67  RSSI  [SJ_2S-TRACE]  38.1,124.46 0 bottom
SJ68  RSSI  [SJ_2S-TRACE]  35.56,144.78 0 bottom
SJ69  RSSI  [SJ_2S-TRACE]  97.79,144.78 180 bottom
SJ70  RSSI  [SJ_2S-TRACE]  101.6,124.46 180 bottom
SJ71  RSSI  [SJ_2S-TRACE]  93.98,124.46 0 bottom
SJ72  RSSI  [SJ_2S-TRACE]  91.44,144.78 0 bottom
SJ73  RSSI  [SJ_2S-TRACE]  153.67,144.78 180 bottom
SJ74  RSSI  [SJ_2S-TRACE]  157.48,124.46 180 bottom
SJ75  RSSI  [SJ_2S-TRACE]  149.86,124.46 0 bottom
SJ76  RSSI  [SJ_2S-TRACE]  147.32,144.78 0 bottom
SJ77  RSSI  [SJ_2S-TRACE]  209.55,144.78 180 bottom
SJ78  RSSI  [SJ_2S-TRACE]  213.36,124.46 180 bottom
SJ79  RSSI  [SJ_2S-TRACE]  205.74,124.46 0 bottom
SJ80  RSSI  [SJ_2S-TRACE]  203.2,144.78 0 bottom
U1  MIC5205 3.3V  [SOT23-5]  109.22,23.37 270 top
U2  XBEE-1B3  [XBEE-SMD]  33.02,20.83 270 top
U3  MIC5205 3.3V  [SOT23-5]  53.34,23.37 270 top
U4  FT231XS  [SSOP20_L]  44.45,20.83 180 top
U5  FT231XS  [SSOP20_L]  100.33,20.83 180 top
U6  XBEE-1B3  [XBEE-SMD]  88.9,20.83 270 top
U7  MIC5205 3.3V  [SOT23-5]  165.1,23.37 270 top
U8  FT231XS  [SSOP20_L]  156.21,20.83 180 top
U9  XBEE-1B3  [XBEE-SMD]  144.78,20.83 270 top
U10  MIC5205 3.3V  [SOT23-5]  220.98,23.37 270 top
U11  FT231XS  [SSOP20_L]  212.09,20.83 180 top
U12  XBEE-1B3  [XBEE-SMD]  200.66,20.83 270 top
U13  MIC5205 3.3V  [SOT23-5]  53.34,51.82 270 top
U14  FT231XS  [SSOP20_L]  44.45,49.28 180 top
U15  XBEE-1B3  [XBEE-SMD]  33.02,49.28 270 top
U16  MIC5205 3.3V  [SOT23-5]  109.22,51.82 270 top
U17  FT231XS  [SSOP20_L]  100.33,49.28 180 top
U18  XBEE-1B3  [XBEE-SMD]  88.9,49.28 270 top
U19  MIC5205 3.3V  [SOT23-5]  165.1,51.82 270 top
U20  FT231XS  [SSOP20_L]  156.21,49.28 180 top
U21  XBEE-1B3  [XBEE-SMD]  144.78,49.28 270 top
U22  MIC5205 3.3V  [SOT23-5]  220.98,51.82 270 top
U23  FT231XS  [SSOP20_L]  212.09,49.28 180 top
U24  XBEE-1B3  [XBEE-SMD]  200.66,49.28 270 top
U25  MIC5205 3.3V  [SOT23-5]  53.34,80.26 270 top
U26  FT231XS  [SSOP20_L]  44.45,77.72 180 top
U27  XBEE-1B3  [XBEE-SMD]  33.02,77.72 270 top
U28  MIC5205 3.3V  [SOT23-5]  109.22,80.26 270 top
U29  FT231XS  [SSOP20_L]  100.33,77.72 180 top
U30  XBEE-1B3  [XBEE-SMD]  88.9,77.72 270 top
U31  MIC5205 3.3V  [SOT23-5]  165.1,80.26 270 top
U32  FT231XS  [SSOP20_L]  156.21,77.72 180 top
U33  XBEE-1B3  [XBEE-SMD]  144.78,77.72 270 top
U34  MIC5205 3.3V  [SOT23-5]  220.98,80.26 270 top
U35  FT231XS  [SSOP20_L]  212.09,77.72 180 top
U36  XBEE-1B3  [XBEE-SMD]  200.66,77.72 270 top
U37  MIC5205 3.3V  [SOT23-5]  53.34,108.71 270 top
U38  FT231XS  [SSOP20_L]  44.45,106.17 180 top
U39  XBEE-1B3  [XBEE-SMD]  33.02,106.17 270 top
U40  MIC5205 3.3V  [SOT23-5]  109.22,108.71 270 top
U41  FT231XS  [SSOP20_L]  100.33,106.17 180 top
U42  XBEE-1B3  [XBEE-SMD]  88.9,106.17 270 top
U43  MIC5205 3.3V  [SOT23-5]  165.1,108.71 270 top
U44  FT231XS  [SSOP20_L]  156.21,106.17 180 top
U45  XBEE-1B3  [XBEE-SMD]  144.78,106.17 270 top
U46  MIC5205 3.3V  [SOT23-5]  220.98,108.71 270 top
U47  FT231XS  [SSOP20_L]  212.09,106.17 180 top
U48  XBEE-1B3  [XBEE-SMD]  200.66,106.17 270 top
U49  MIC5205 3.3V  [SOT23-5]  53.34,137.16 270 top
U50  FT231XS  [SSOP20_L]  44.45,134.62 180 top
U51  XBEE-1B3  [XBEE-SMD]  33.02,134.62 270 top
U52  MIC5205 3.3V  [SOT23-5]  109.22,137.16 270 top
U53  FT231XS  [SSOP20_L]  100.33,134.62 180 top
U54  XBEE-1B3  [XBEE-SMD]  88.9,134.62 270 top
U55  MIC5205 3.3V  [SOT23-5]  165.1,137.16 270 top
U56  FT231XS  [SSOP20_L]  156.21,134.62 180 top
U57  XBEE-1B3  [XBEE-SMD]  144.78,134.62 270 top
U58  MIC5205 3.3V  [SOT23-5]  220.98,137.16 270 top
U59  FT231XS  [SSOP20_L]  212.09,134.62 180 top
U60  XBEE-1B3  [XBEE-SMD]  200.66,134.62 270 top
U$1  LOGO-SFESK  [SFE-LOGO-FLAME]  29.46,8 0 top
U$2  LOGO-SFESK  [SFE-LOGO-FLAME]  85.34,8 0 top
U$3  LOGO-SFENEW  [SFE-NEW-WEBLOGO]  109.47,18.67 0 bottom
U$4  LOGO-SFENEW  [SFE-NEW-WEBLOGO]  53.59,18.67 0 bottom
U$5  STAND-OFF  [STAND-OFF]  24.13,9.4 0 top
U$6  STAND-OFF  [STAND-OFF]  80.01,9.4 0 top
U$7  OSHW-LOGOS  [OSHW-LOGO-S]  30.48,32.26 0 top
U$8  OSHW-LOGOS  [OSHW-LOGO-S]  31.75,20.83 0 bottom
U$9  STAND-OFF  [STAND-OFF]  24.13,32.26 0 top
U$10  STAND-OFF  [STAND-OFF]  59.69,32.26 0 top
U$11  STAND-OFF  [STAND-OFF]  59.69,9.4 0 top
U$12  STAND-OFF  [STAND-OFF]  80.01,32.26 0 top
U$13  STAND-OFF  [STAND-OFF]  115.57,32.26 0 top
U$14  STAND-OFF  [STAND-OFF]  115.57,9.4 0 top
U$15  OSHW-LOGOS  [OSHW-LOGO-S]  87.63,20.83 0 bottom
U$16  OSHW-LOGOS  [OSHW-LOGO-S]  86.36,32.26 0 top
U$17  LOGO-SFESK  [SFE-LOGO-FLAME]  141.22,8 0 top
U$18  LOGO-SFENEW  [SFE-NEW-WEBLOGO]  165.35,18.67 0 bottom
U$19  STAND-OFF  [STAND-OFF]  135.89,9.4 0 top
U$20  STAND-OFF  [STAND-OFF]  135.89,32.26 0 top
U$21  STAND-OFF  [STAND-OFF]  171.45,32.26 0 top
U$22  STAND-OFF  [STAND-OFF]  171.45,9.4 0 top
U$23  OSHW-LOGOS  [OSHW-LOGO-S]  143.51,20.83 0 bottom
U$24  OSHW-LOGOS  [OSHW-LOGO-S]  142.24,32.26 0 top
U$25  LOGO-SFESK  [SFE-LOGO-FLAME]  197.1,8 0 top
U$26  LOGO-SFENEW  [SFE-NEW-WEBLOGO]  221.23,18.67 0 bottom
U$27  STAND-OFF  [STAND-OFF]  191.77,9.4 0 top
U$28  STAND-OFF  [STAND-OFF]  191.77,32.26 0 top
U$29  STAND-OFF  [STAND-OFF]  227.33,32.26 0 top
U$30  STAND-OFF  [STAND-OFF]  227.33,9.4 0 top
U$31  OSHW-LOGOS  [OSHW-LOGO-S]  199.39,20.83 0 bottom
U$32  OSHW-LOGOS  [OSHW-LOGO-S]  198.12,32.26 0 top
U$33  LOGO-SFESK  [SFE-LOGO-FLAME]  29.46,36.45 0 top
U$34  LOGO-SFENEW  [SFE-NEW-WEBLOGO]  53.59,47.12 0 bottom
U$35  STAND-OFF  [STAND-OFF]  24.13,37.85 0 top
U$36  STAND-OFF  [STAND-OFF]  24.13,60.71 0 top
U$37  STAND-OFF  [STAND-OFF]  59.69,60.71 0 top
U$38  STAND-OFF  [STAND-OFF]  59.69,37.85 0 top
U$39  OSHW-LOGOS  [OSHW-LOGO-S]  31.75,49.28 0 bottom
U$40  OSHW-LOGOS  [OSHW-LOGO-S]  30.48,60.71 0 top
U$41  LOGO-SFESK  [SFE-LOGO-FLAME]  85.34,36.45 0 top
U$42  LOGO-SFENEW  [SFE-NEW-WEBLOGO]  109.47,47.12 0 bottom
U$43  STAND-OFF  [STAND-OFF]  80.01,37.85 0 top
U$44  STAND-OFF  [STAND-OFF]  80.01,60.71 0 top
U$45  STAND-OFF  [STAND-OFF]  115.57,60.71 0 top
U$46  STAND-OFF  [STAND-OFF]  115.57,37.85 0 top
U$47  OSHW-LOGOS  [OSHW-LOGO-S]  87.63,49.28 0 bottom
U$48  OSHW-LOGOS  [OSHW-LOGO-S]  86.36,60.71 0 top
U$49  LOGO-SFESK  [SFE-LOGO-FLAME]  141.22,36.45 0 top
U$50  LOGO-SFENEW  [SFE-NEW-WEBLOGO]  165.35,47.12 0 bottom
U$51  STAND-OFF  [STAND-OFF]  135.89,37.85 0 top
U$52  STAND-OFF  [STAND-OFF]  135.89,60.71 0 top
U$53  STAND-OFF  [STAND-OFF]  171.45,60.71 0 top
U$54  STAND-OFF  [STAND-OFF]  171.45,37.85 0 top
U$55  OSHW-LOGOS  [OSHW-LOGO-S]  143.51,49.28 0 bottom
U$56  OSHW-LOGOS  [OSHW-LOGO-S]  142.24,60.71 0 top
U$57  LOGO-SFESK  [SFE-LOGO-FLAME]  197.1,36.45 0 top
U$58  LOGO-SFENEW  [SFE-NEW-WEBLOGO]  221.23,47.12 0 bottom
U$59  STAND-OFF  [STAND-OFF]  191.77,37.85 0 top
U$60  STAND-OFF  [STAND-OFF]  191.77,60.71 0 top
U$61  STAND-OFF  [STAND-OFF]  227.33,60.71 0 top
U$62  STAND-OFF  [STAND-OFF]  227.33,37.85 0 top
U$63  OSHW-LOGOS  [OSHW-LOGO-S]  199.39,49.28 0 bottom
U$64  OSHW-LOGOS  [OSHW-LOGO-S]  198.12,60.71 0 top
U$65  LOGO-SFESK  [SFE-LOGO-FLAME]  29.46,64.9 0 top
U$66  LOGO-SFENEW  [SFE-NEW-WEBLOGO]  53.59,75.56 0 bottom
U$67  STAND-OFF  [STAND-OFF]  24.13,66.29 0 top
U$68  STAND-OFF  [STAND-OFF]  24.13,89.15 0 top
U$69  STAND-OFF  [STAND-OFF]  59.69,89.15 0 top
U$70  STAND-OFF  [STAND-OFF]  59.69,66.29 0 top
U$71  OSHW-LOGOS  [OSHW-LOGO-S]  31.75,77.72 0 bottom
U$72  OSHW-LOGOS  [OSHW-LOGO-S]  30.48,89.15 0 top
U$73  LOGO-SFESK  [SFE-LOGO-FLAME]  85.34,64.9 0 top
U$74  LOGO-SFENEW  [SFE-NEW-WEBLOGO]  109.47,75.56 0 bottom
U$75  STAND-OFF  [STAND-OFF]  80.01,66.29 0 top
U$76  STAND-OFF  [STAND-OFF]  80.01,89.15 0 top
U$77  STAND-OFF  [STAND-OFF]  115.57,89.15 0 top
U$78  STAND-OFF  [STAND-OFF]  115.57,66.29 0 top
U$79  OSHW-LOGOS  [OSHW-LOGO-S]  87.63,77.72 0 bottom
U$80  OSHW-LOGOS  [OSHW-LOGO-S]  86.36,89.15 0 top
U$81  LOGO-SFESK  [SFE-LOGO-FLAME]  141.22,64.9 0 top
U$82  LOGO-SFENEW  [SFE-NEW-WEBLOGO]  165.35,75.56 0 bottom
U$83  STAND-OFF  [STAND-OFF]  135.89,66.29 0 top
U$84  STAND-OFF  [STAND-OFF]  135.89,89.15 0 top
U$85  STAND-OFF  [STAND-OFF]  171.45,89.15 0 top
U$86  STAND-OFF  [STAND-OFF]  171.45,66.29 0 top
U$87  OSHW-LOGOS  [OSHW-LOGO-S]  143.51,77.72 0 bottom
U$88  OSHW-LOGOS  [OSHW-LOGO-S]  142.24,89.15 0 top
U$89  LOGO-SFESK  [SFE-LOGO-FLAME]  197.1,64.9 0 top
U$90  LOGO-SFENEW  [SFE-NEW-WEBLOGO]  221.23,75.56 0 bottom
U$91  STAND-OFF  [STAND-OFF]  191.77,66.29 0 top
U$92  STAND-OFF  [STAND-OFF]  191.77,89.15 0 top
U$93  STAND-OFF  [STAND-OFF]  227.33,89.15 0 top
U$94  STAND-OFF  [STAND-OFF]  227.33,66.29 0 top
U$95  OSHW-LOGOS  [OSHW-LOGO-S]  199.39,77.72 0 bottom
U$96  OSHW-LOGOS  [OSHW-LOGO-S]  198.12,89.15 0 top
U$97  LOGO-SFESK  [SFE-LOGO-FLAME]  29.46,93.34 0 top
U$98  LOGO-SFENEW  [SFE-NEW-WEBLOGO]  53.59,104.01 0 bottom
U$99  STAND-OFF  [STAND-OFF]  24.13,94.74 0 top
U$100  STAND-OFF  [STAND-OFF]  24.13,117.6 0 top
U$101  STAND-OFF  [STAND-OFF]  59.69,117.6 0 top
U$102  STAND-OFF  [STAND-OFF]  59.69,94.74 0 top
U$103  OSHW-LOGOS  [OSHW-LOGO-S]  31.75,106.17 0 bottom
U$104  OSHW-LOGOS  [OSHW-LOGO-S]  30.48,117.6 0 top
U$105  LOGO-SFESK  [SFE-LOGO-FLAME]  85.34,93.34 0 top
U$106  LOGO-SFENEW  [SFE-NEW-WEBLOGO]  109.47,104.01 0 bottom
U$107  STAND-OFF  [STAND-OFF]  80.01,94.74 0 top
U$108  STAND-OFF  [STAND-OFF]  80.01,117.6 0 top
U$109  STAND-OFF  [STAND-OFF]  115.57,117.6 0 top
U$110  STAND-OFF  [STAND-OFF]  115.57,94.74 0 top
U$111  OSHW-LOGOS  [OSHW-LOGO-S]  87.63,106.17 0 bottom
U$112  OSHW-LOGOS  [OSHW-LOGO-S]  86.36,117.6 0 top
U$113  LOGO-SFESK  [SFE-LOGO-FLAME]  141.22,93.34 0 top
U$114  LOGO-SFENEW  [SFE-NEW-WEBLOGO]  165.35,104.01 0 bottom
U$115  STAND-OFF  [STAND-OFF]  135.89,94.74 0 top
U$116  STAND-OFF  [STAND-OFF]  135.89,117.6 0 top
U$117  STAND-OFF  [STAND-OFF]  171.45,117.6 0 top
U$118  STAND-OFF  [STAND-OFF]  171.45,94.74 0 top
U$119  OSHW-LOGOS  [OSHW-LOGO-S]  143.51,106.17 0 bottom
U$120  OSHW-LOGOS  [OSHW-LOGO-S]  142.24,117.6 0 top
U$121  LOGO-SFESK  [SFE-LOGO-FLAME]  197.1,93.34 0 top
U$122  LOGO-SFENEW  [SFE-NEW-WEBLOGO]  221.23,104.01 0 bottom
U$123  STAND-OFF  [STAND-OFF]  191.77,94.74 0 top
U$124  STAND-OFF  [STAND-OFF]  191.77,117.6 0 top
U$125  STAND-OFF  [STAND-OFF]  227.33,117.6 0 top
U$126  STAND-OFF  [STAND-OFF]  227.33,94.74 0 top
U$127  OSHW-LOGOS  [OSHW-LOGO-S]  199.39,106.17 0 bottom
U$128  OSHW-LOGOS  [OSHW-LOGO-S]  198.12,117.6 0 top
U$129  LOGO-SFESK  [SFE-LOGO-FLAME]  29.46,121.79 0 top
U$130  LOGO-SFENEW  [SFE-NEW-WEBLOGO]  53.59,132.46 0 bottom
U$131  STAND-OFF  [STAND-OFF]  24.13,123.19 0 top
U$132  STAND-OFF  [STAND-OFF]  24.13,146.05 0 top
U$133  STAND-OFF  [STAND-OFF]  59.69,146.05 0 top
U$134  STAND-OFF  [STAND-OFF]  59.69,123.19 0 top
U$135  OSHW-LOGOS  [OSHW-LOGO-S]  31.75,134.62 0 bottom
U$136  OSHW-LOGOS  [OSHW-LOGO-S]  30.48,146.05 0 top
U$137  LOGO-SFESK  [SFE-LOGO-FLAME]  85.34,121.79 0 top
U$138  LOGO-SFENEW  [SFE-NEW-WEBLOGO]  109.47,132.46 0 bottom
U$139  STAND-OFF  [STAND-OFF]  80.01,123.19 0 top
U$140  STAND-OFF  [STAND-OFF]  80.01,146.05 0 top
U$141  STAND-OFF  [STAND-OFF]  115.57,146.05 0 top
U$142  STAND-OFF  [STAND-OFF]  115.57,123.19 0 top
U$143  OSHW-LOGOS  [OSHW-LOGO-S]  87.63,134.62 0 bottom
U$144  OSHW-LOGOS  [OSHW-LOGO-S]  86.36,146.05 0 top
U$145  LOGO-SFESK  [SFE-LOGO-FLAME]  141.22,121.79 0 top
U$146  LOGO-SFENEW  [SFE-NEW-WEBLOGO]  165.35,132.46 0 bottom
U$147  STAND-OFF  [STAND-OFF]  135.89,123.19 0 top
U$148  STAND-OFF  [STAND-OFF]  135.89,146.05 0 top
U$149  STAND-OFF  [STAND-OFF]  171.45,146.05 0 top
U$150  STAND-OFF  [STAND-OFF]  171.45,123.19 0 top
U$151  OSHW-LOGOS  [OSHW-LOGO-S]  143.51,134.62 0 bottom
U$152  OSHW-LOGOS  [OSHW-LOGO-S]  142.24,146.05 0 top
U$153  LOGO-SFESK  [SFE-LOGO-FLAME]  197.1,121.79 0 top
U$154  LOGO-SFENEW  [SFE-NEW-WEBLOGO]  221.23,132.46 0 bottom
U$155  STAND-OFF  [STAND-OFF]  191.77,123.19 0 top
U$156  STAND-OFF  [STAND-OFF]  191.77,146.05 0 top
U$157  STAND-OFF  [STAND-OFF]  227.33,146.05 0 top
U$158  STAND-OFF  [STAND-OFF]  227.33,123.19 0 top
U$159  OSHW-LOGOS  [OSHW-LOGO-S]  199.39,134.62 0 bottom
U$160  OSHW-LOGOS  [OSHW-LOGO-S]  198.12,146.05 0 top

## Library data of the parts
C1-C120 JP2-JP5 JP7 JP8 JP10 JP11 JP13 JP14 JP16 JP17 JP19 JP20 JP22 JP23 JP25 JP26 JP28 JP29 JP31 JP32 JP34 JP35 JP37 JP38 JP40 JP41 JP43 JP44 JP46 JP47 JP49 JP50 JP52 JP53 JP55 JP56 JP58 JP59 R1-R120 U1 U3 U7 U10 U13 U16 U19 U22 U25 U28 U31 U34 U37 U40 U43 U46 U49 U52 U55 U58 U$1-U$160 = SparkFun
D1 D4 D5 D8 D9 D12 D13 D16 D17 D20 D21 D24 D25 D28 D29 D32 D33 D36 D37 D40 D41 D44 D45 D48 D49 D52 D53 D56 D57 D60 D61 D64 D65 D68 D69 D72 D73 D76 D77 D80 = SparkFun-LED; PROD_ID: DIO-00819
D2 D3 D6 D7 D10 D11 D14 D15 D18 D19 D22 D23 D26 D27 D30 D31 D34 D35 D38 D39 D42 D43 D46 D47 D50 D51 D54 D55 D58 D59 D62 D63 D66 D67 D70 D71 D74 D75 D78 D79 = SparkFun-LED; PROD_ID: DIO-00821
E$1 = SparkFun-Retired
E$5 E$7 FID1-FID40 = SparkFun-Aesthetics
JP1 JP6 JP9 JP12 JP15 JP18 JP21 JP24 JP27 JP30 JP33 JP36 JP39 JP42 JP45 JP48 JP51 JP54 JP57 JP60 = SparkFun-Connectors
S1-S20 = SparkFun-Electromechanical; PROD_ID: SWCH-08247
SJ1-SJ80 = SparkFun-Passives
U2 U6 U9 U12 U15 U18 U21 U24 U27 U30 U33 U36 U39 U42 U45 U48 U51 U54 U57 U60 = SparkFun-RF; PROD_ID: CONN-09042
U4 U5 U8 U11 U14 U17 U20 U23 U26 U29 U32 U35 U38 U41 U44 U47 U50 U53 U56 U59 = SparkFun-DigitalIC